# Altium PCB Filters.PcbDoc
Units mil, origin at the board's own origin, x right, y up, seen from the top; angles counter-clockwise.
Board outline 5500 x 6500 mil, 4 copper layers (Top Layer, Power, Ground, Bottom Layer), stack 68.756 mil thick; 70 components, 54 nets, 198 pads, 89 vias.
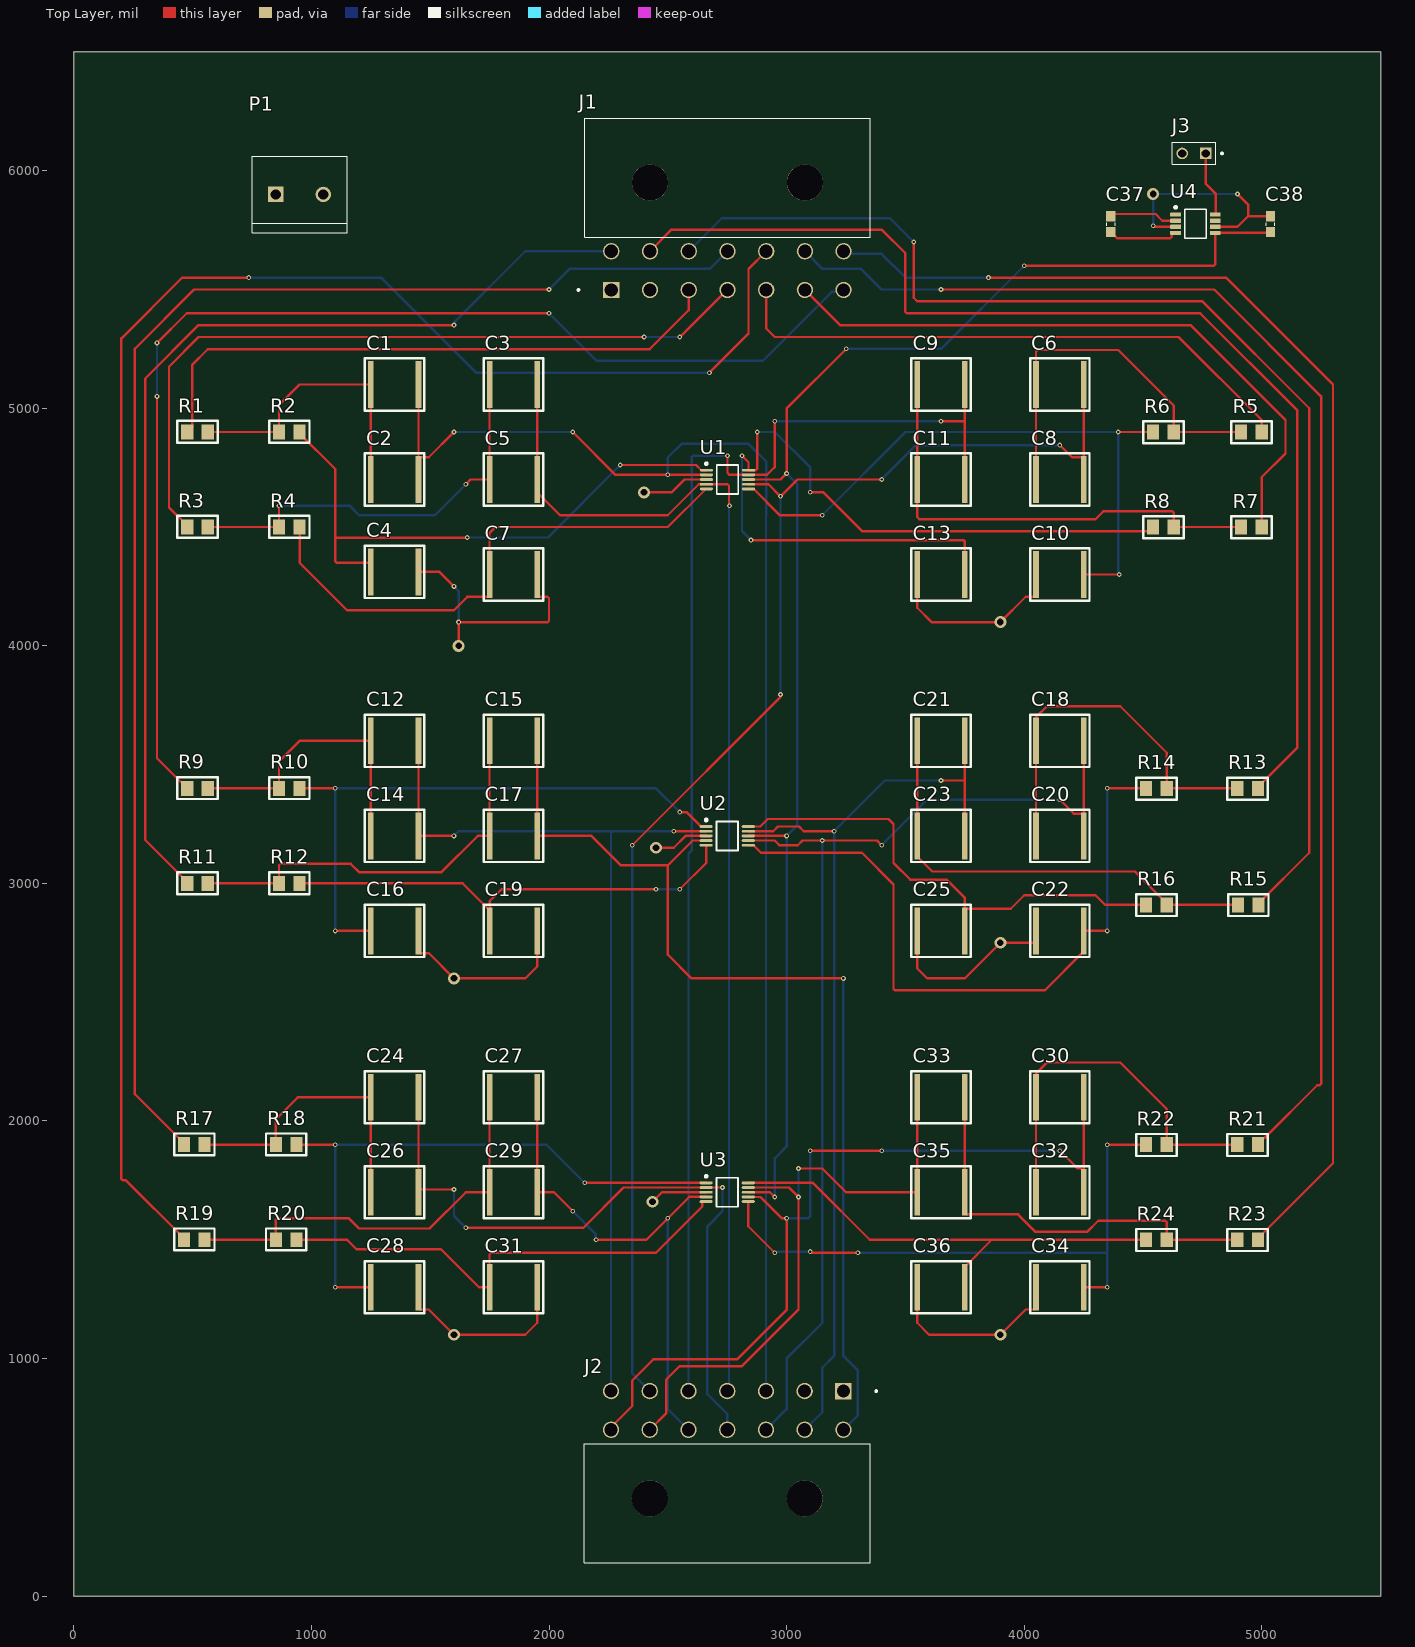
[diagram p0: Top Layer view]
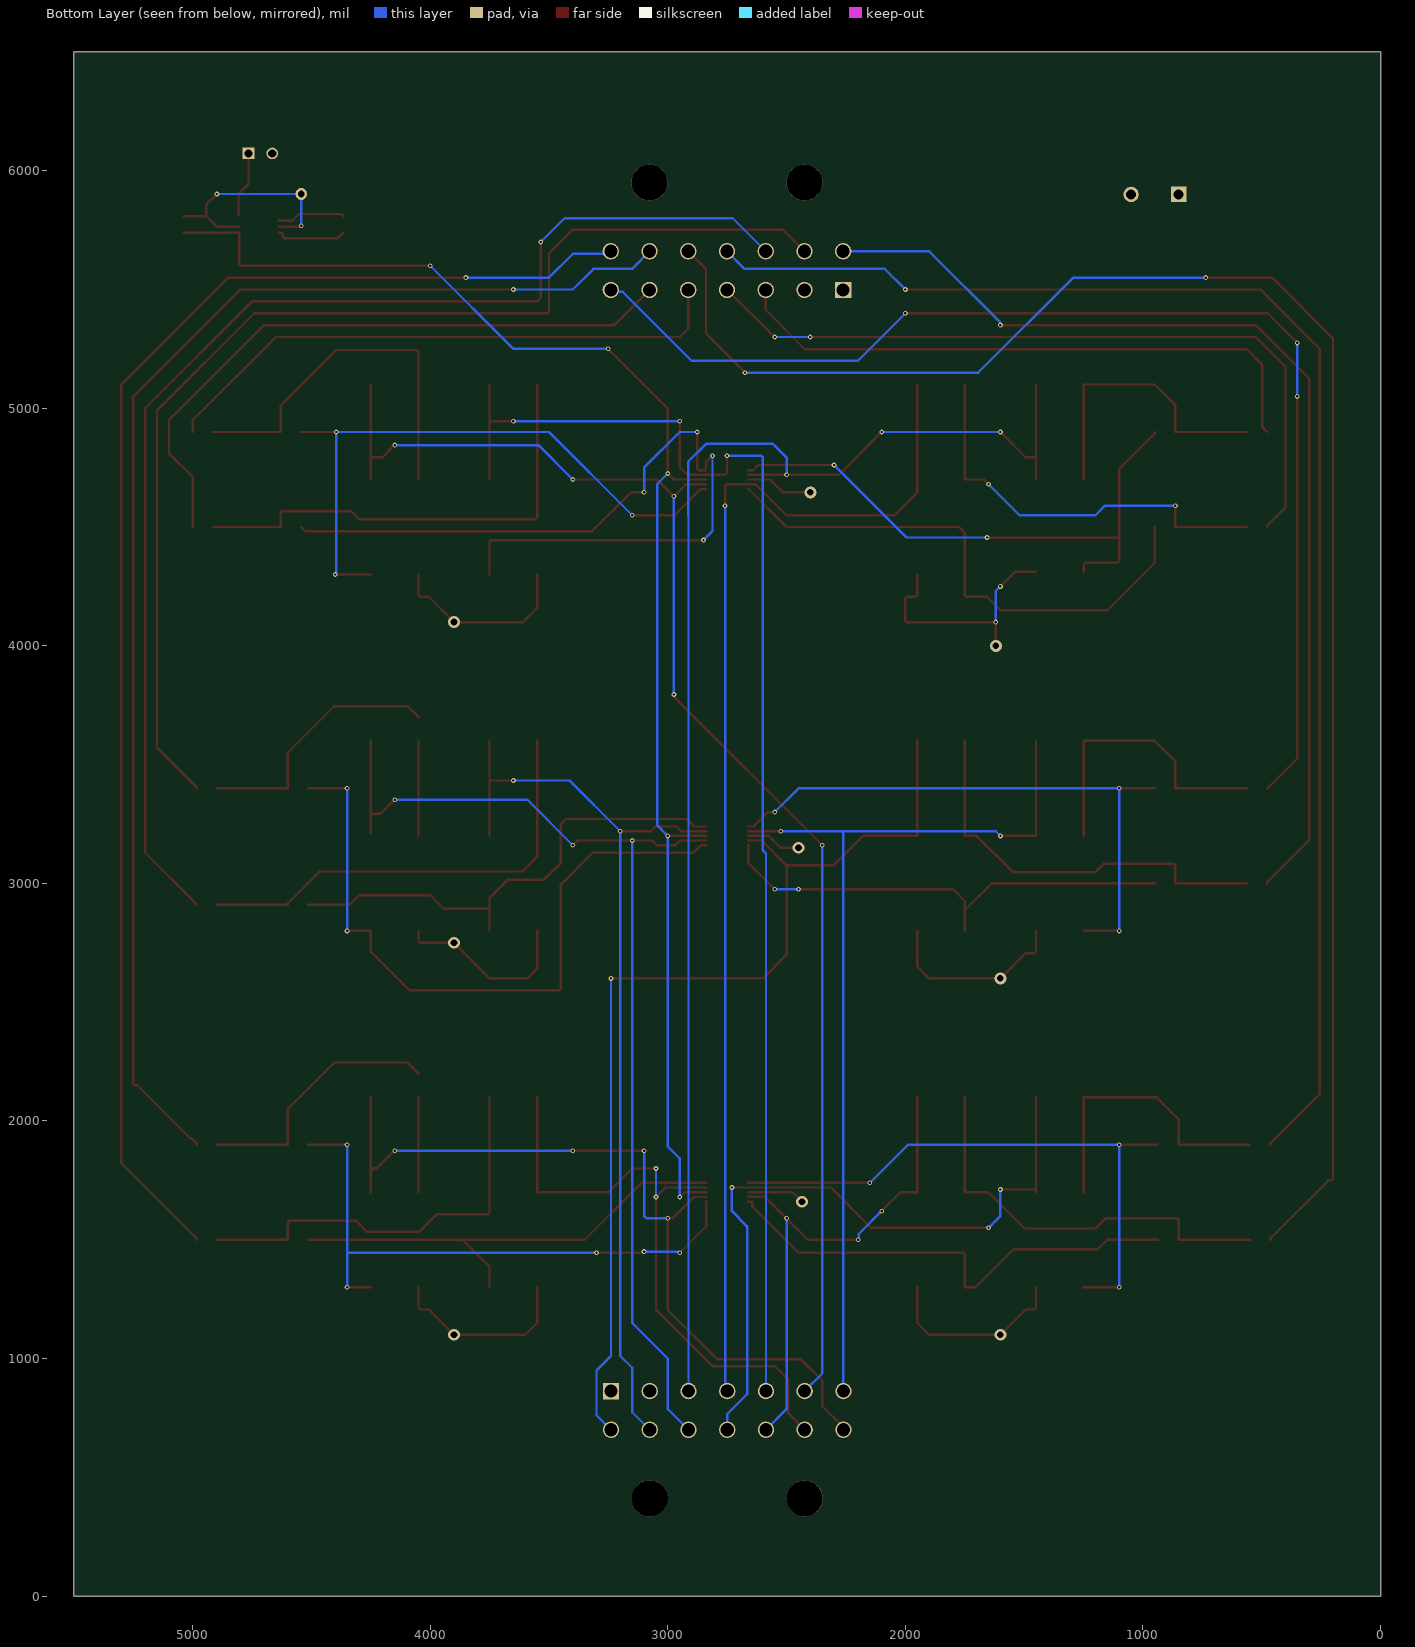
[diagram p1: Bottom Layer view, seen from below]
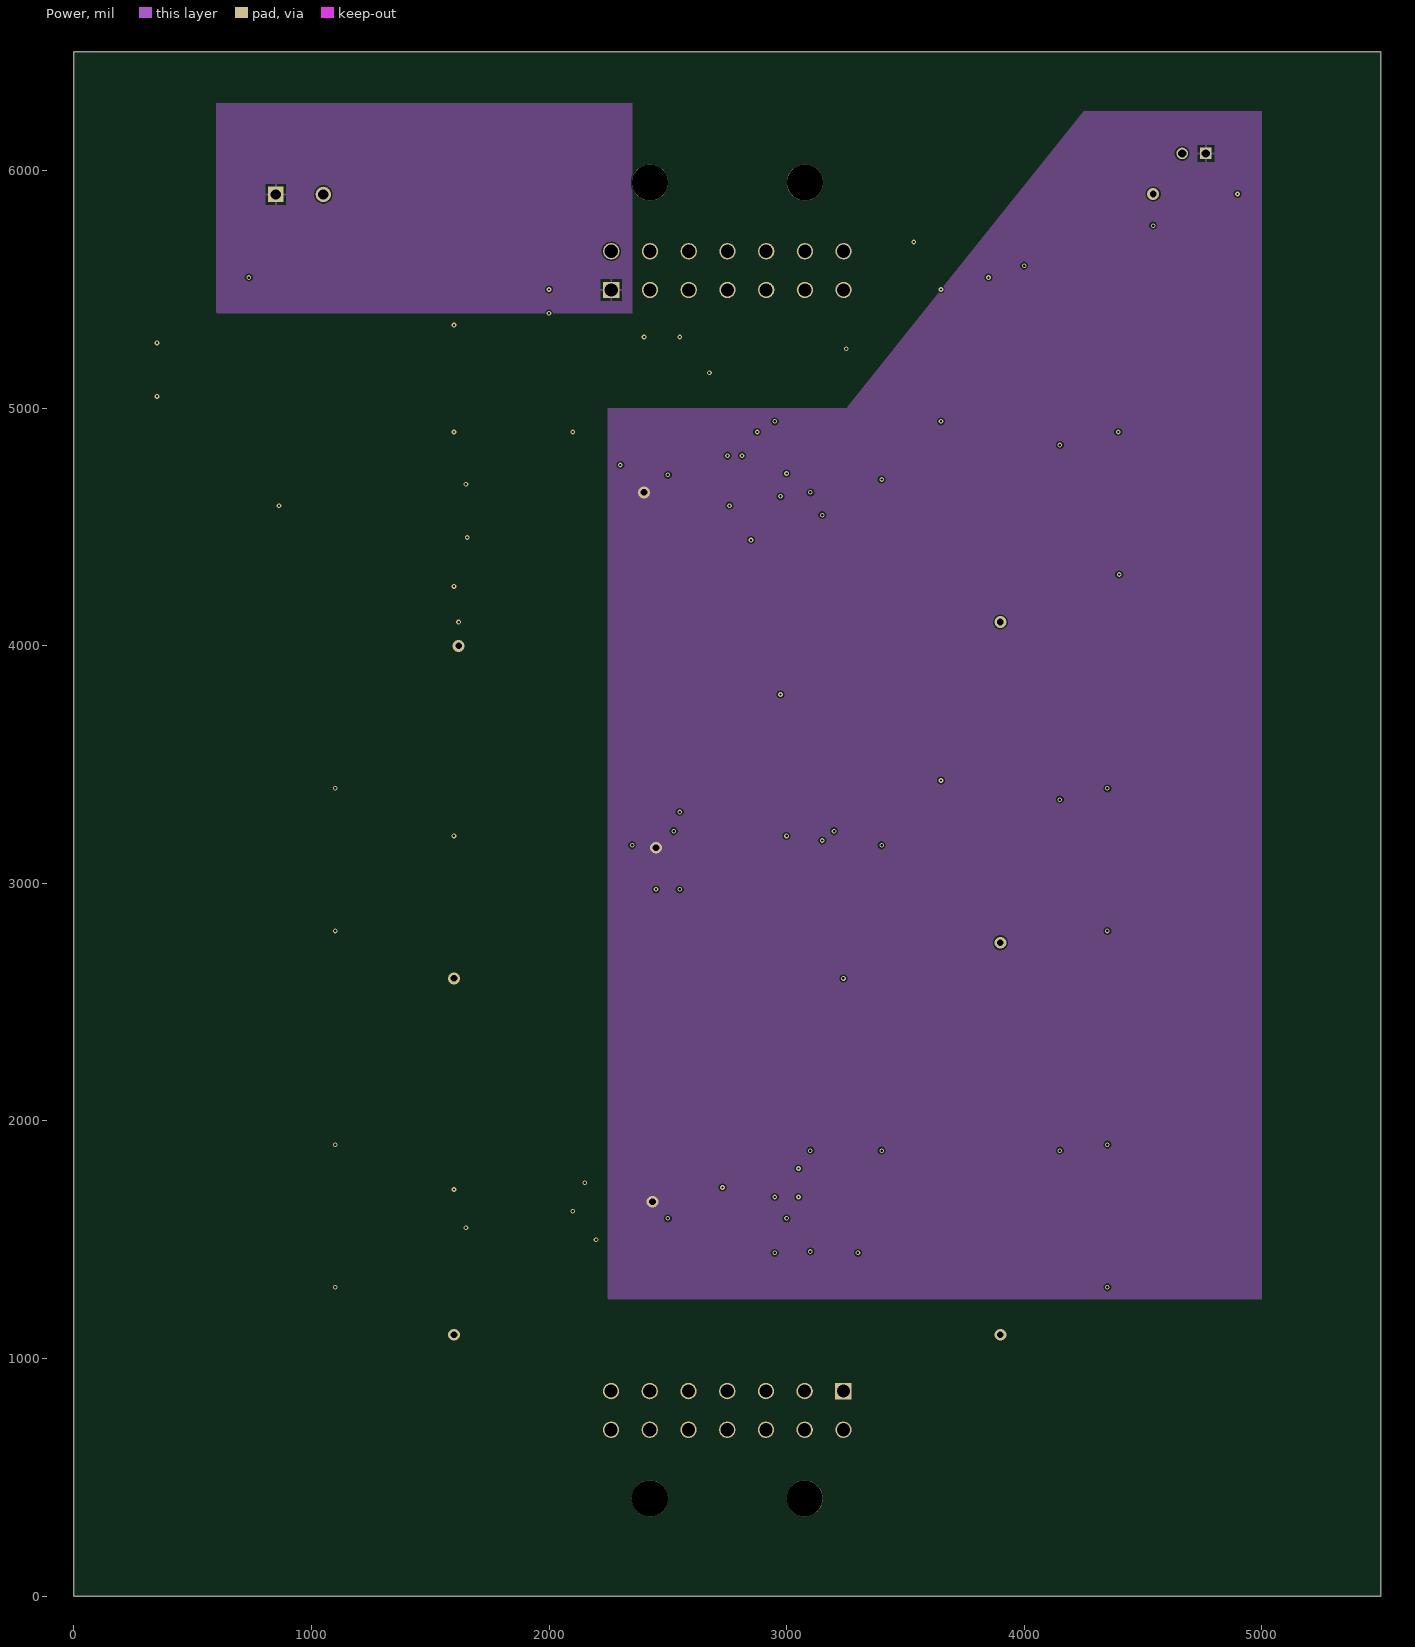
[diagram p2: Power]
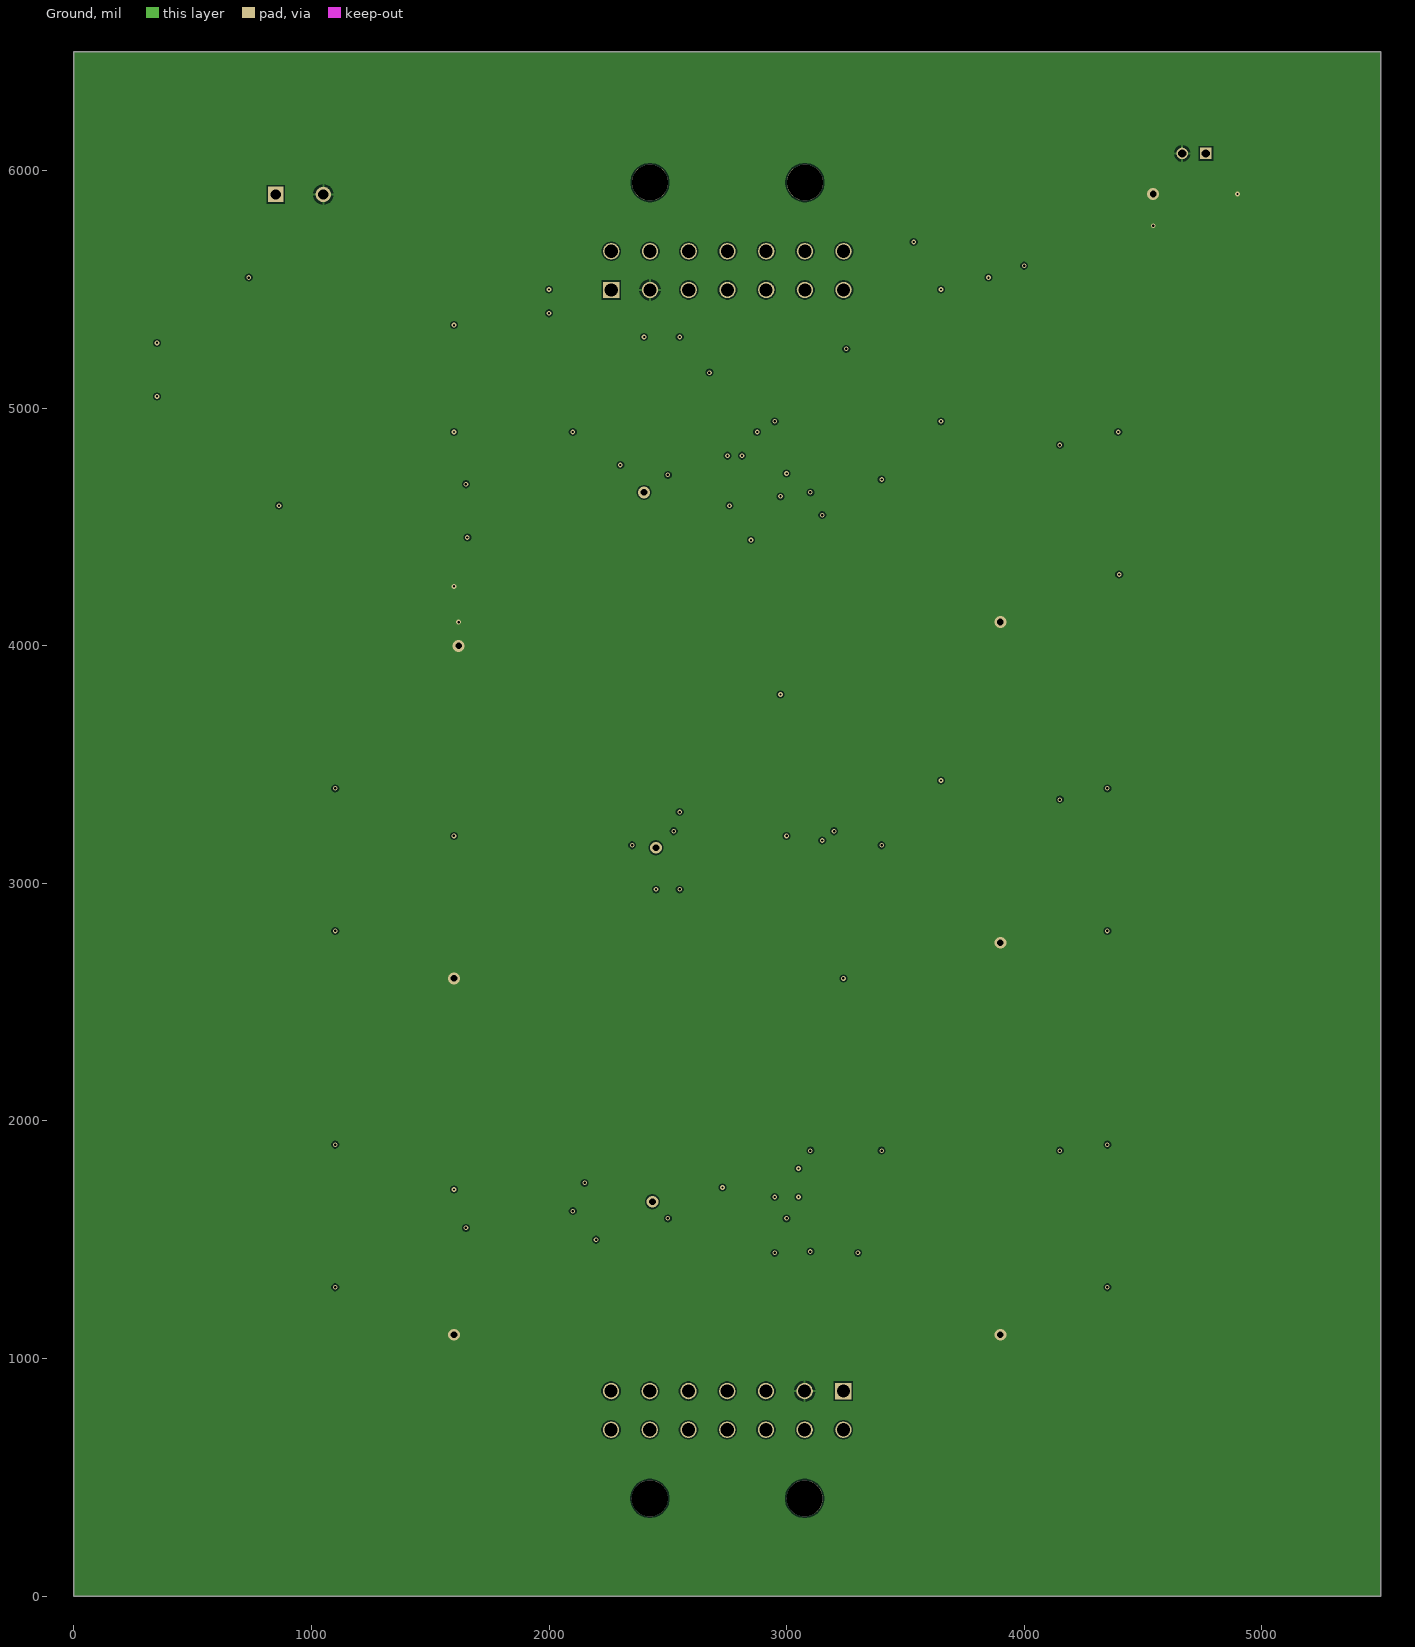
[diagram p3: Ground]

## Layer stack, top to bottom
Top Solder: solder mask 0.5, Solder Resist, Dk 3.3
Top Layer: signal copper 0.7
Dielectric 1: prepreg 2.8, PP-006, Dk 4.1
Power: signal copper 1.378
Dielectric1: core 59, FR-4, Dk 4.3
Ground: signal copper 1.378
Dielectric 2: prepreg 2.8, PP-006, Dk 4.1
Bottom Layer: signal copper 0.7
Bottom Solder: solder mask 0.5, Solder Resist, Dk 3.3

## Board outline
0,0 5500,0 5500,6500 0,6500

## Design rules (kind name [scope] priority, off if disabled: settings)
Clearance [All] p1: gap=6 ignorepadtopadclearanceinfootprint=TRUE
DiffPairsRouting [All] p1: maxlimit=10 minlimit=10 mostfreqgap=10 toplayer_minwidth=10 toplayer_maxwidth=10 toplayer_prefwidth=10 midlayer1_minwidth=10 midlayer1_maxwidth=10 midlayer1_prefwidth=10 midlayer2_minwidth=10 midlayer2_maxwidth=10 midlayer2_prefwidth=10 bottomlayer_minwidth=10 bottomlayer_maxwidth=10 bottomlayer_prefwidth=10 maxuncoupledlength=500
HoleSize [All] p1: absolutevalues=TRUE maxlimit=300 minlimit=10 maxpercent=80.000 minpercent=20.000
MinimumAnnularRing [All] p1: minimumring=10
PasteMaskExpansion [All] p1: expansion=10
PlaneClearance [All] p1: clearance=15
PlaneConnect [All] p1: pad.planeconnectstyle=Relief pad.reliefexpansion=20 pad.reliefentries=4 pad.reliefconductorwidth=10 pad.reliefairgap=10 via.planeconnectstyle=Direct via.reliefexpansion=20 via.reliefentries=4 via.reliefconductorwidth=10 via.reliefairgap=10
PolygonConnect [All] p1: thpad.connectstyle=Relief thpad.reliefconductorwidth=10 thpad.reliefentries=4 thpad.polygonreliefangle="90 Angle" thpad.airgapwidth=10 smdpad.connectstyle=Relief smdpad.reliefconductorwidth=10 smdpad.reliefentries=4 smdpad.polygonreliefangle="90 Angle" smdpad.airgapwidth=10 via.connectstyle=Direct via.reliefconductorwidth=10 via.reliefentries=4 via.polygonreliefangle="90 Angle" via.airgapwidth=10
RoutingVias [All] p1: holewidth=10 width=20 viastyle="Through Hole" minholewidth=10 minwidth=20 maxholewidth=10 maxwidth=20
SMDNeckDown [All] p1: percent=100.000
SilkToSolderMaskClearance SilkscreenOverComponentPads [IsPad] p1: minsilkscreentomaskgap=10 clearancetoexposedcopper=TRUE
SolderMaskExpansion [All] p1: expansion=10 istentingtop=FALSE
Width [All] p1: maxlimit=10 minlimit=10 preferedwidth=10
24 further rules are at their usual default settings.

## Components (designator, comment, footprint, x,y, rotation, side; value= is the part's Value field where it differs from the comment)
C1 "CAP CER 0.47UF 50V C0G/NP0 2220" "2220 (5650) Capacitor" 1350,5100 r180 top
C2 "CAP CER 0.47UF 50V C0G/NP0 2220" "2220 (5650) Capacitor" 1350,4700 r180 top
C3 "CAP CER 0.47UF 50V C0G/NP0 2220" "2220 (5650) Capacitor" 1850,5100 r180 top
C4 "CAP CER 0.47UF 50V C0G/NP0 2220" "2220 (5650) Capacitor" 1350,4311.22 r0 top
C5 "CAP CER 0.47UF 50V C0G/NP0 2220" "2220 (5650) Capacitor" 1850,4700 r180 top
C6 "CAP CER 0.47UF 50V C0G/NP0 2220" "2220 (5650) Capacitor" 4150,5100 r0 top
C7 "CAP CER 0.47UF 50V C0G/NP0 2220" "2220 (5650) Capacitor" 1850,4300 r0 top
C8 "CAP CER 0.47UF 50V C0G/NP0 2220" "2220 (5650) Capacitor" 4150,4700 r0 top
C9 "CAP CER 0.47UF 50V C0G/NP0 2220" "2220 (5650) Capacitor" 3650,5100 r0 top
C10 "CAP CER 0.47UF 50V C0G/NP0 2220" "2220 (5650) Capacitor" 4150,4300 r180 top
C11 "CAP CER 0.47UF 50V C0G/NP0 2220" "2220 (5650) Capacitor" 3650,4700 r0 top
C12 "CAP CER 0.47UF 50V C0G/NP0 2220" "2220 (5650) Capacitor" 1350,3600 r0 top
C13 "CAP CER 0.47UF 50V C0G/NP0 2220" "2220 (5650) Capacitor" 3650,4300 r180 top
C14 "CAP CER 0.47UF 50V C0G/NP0 2220" "2220 (5650) Capacitor" 1350,3200 r0 top
C15 "CAP CER 0.47UF 50V C0G/NP0 2220" "2220 (5650) Capacitor" 1850,3600 r0 top
C16 "CAP CER 0.47UF 50V C0G/NP0 2220" "2220 (5650) Capacitor" 1350,2800 r0 top
C17 "CAP CER 0.47UF 50V C0G/NP0 2220" "2220 (5650) Capacitor" 1850,3200 r0 top
C18 "CAP CER 0.47UF 50V C0G/NP0 2220" "2220 (5650) Capacitor" 4150,3600 r0 top
C19 "CAP CER 0.47UF 50V C0G/NP0 2220" "2220 (5650) Capacitor" 1850.39,2800 r0 top
C20 "CAP CER 0.47UF 50V C0G/NP0 2220" "2220 (5650) Capacitor" 4150,3200 r0 top
C21 "CAP CER 0.47UF 50V C0G/NP0 2220" "2220 (5650) Capacitor" 3650,3600 r0 top
C22 "CAP CER 0.47UF 50V C0G/NP0 2220" "2220 (5650) Capacitor" 4150,2800 r180 top
C23 "CAP CER 0.47UF 50V C0G/NP0 2220" "2220 (5650) Capacitor" 3650,3200 r0 top
C24 "CAP CER 0.47UF 50V C0G/NP0 2220" "2220 (5650) Capacitor" 1350,2100 r0 top
C25 "CAP CER 0.47UF 50V C0G/NP0 2220" "2220 (5650) Capacitor" 3650,2800 r180 top
C26 "CAP CER 0.47UF 50V C0G/NP0 2220" "2220 (5650) Capacitor" 1350,1700 r0 top
C27 "CAP CER 0.47UF 50V C0G/NP0 2220" "2220 (5650) Capacitor" 1850,2100 r0 top
C28 "CAP CER 0.47UF 50V C0G/NP0 2220" "2220 (5650) Capacitor" 1350,1300 r0 top
C29 "CAP CER 0.47UF 50V C0G/NP0 2220" "2220 (5650) Capacitor" 1850,1700 r0 top
C30 "CAP CER 0.47UF 50V C0G/NP0 2220" "2220 (5650) Capacitor" 4150,2100 r0 top
C31 "CAP CER 0.47UF 50V C0G/NP0 2220" "2220 (5650) Capacitor" 1850,1300 r0 top
C32 "CAP CER 0.47UF 50V C0G/NP0 2220" "2220 (5650) Capacitor" 4150,1700 r0 top
C33 "CAP CER 0.47UF 50V C0G/NP0 2220" "2220 (5650) Capacitor" 3650,2100 r0 top
C34 "CAP CER 0.47UF 50V C0G/NP0 2220" "2220 (5650) Capacitor" 4150,1300 r180 top
C35 "CAP CER 0.47UF 50V C0G/NP0 2220" "2220 (5650) Capacitor" 3650,1700 r0 top
C36 "CAP CER 0.47UF 50V C0G/NP0 2220" "2220 (5650) Capacitor" 3650,1300 r180 top
C37 "TACL106K010RTA" CAPC1608X90 4365,5775 r270 top
C38 "TACL106K010RTA" CAPC1608X90 5037,5775 r270 top
J1 "Connector Header, 14-Position, 2 Rows, Male Pin" TE_1-770973-0 2262.01,5498.03 r180 top
J2 "Connector Header, 14-Position, 2 Rows, Male Pin" TE_1-770973-0 3238.98,862.99 r0 top
J3 "146285-2" TE_146285-2 4764.98,6072.69 r180 top
P1 "282837-2" TE_282837-2 950,5900 r0 top
R1 "RES SMD 5.1K OHM 1% 0.4W 0805" "0805 Resistor" 520.08,4900 r0 top
R2 "RES SMD 5.1K OHM 1% 0.4W 0805" "0805 Resistor" 906.69,4900 r0 top
R3 "RES SMD 5.1K OHM 1% 0.4W 0805" "0805 Resistor" 520.08,4500 r0 top
R4 "RES SMD 5.1K OHM 1% 0.4W 0805" "0805 Resistor" 906.69,4500 r0 top
R5 "RES SMD 5.1K OHM 1% 0.4W 0805" "0805 Resistor" 4956.69,4900 r180 top
R6 "RES SMD 5.1K OHM 1% 0.4W 0805" "0805 Resistor" 4586.29,4900 r180 top
R7 "RES SMD 5.1K OHM 1% 0.4W 0805" "0805 Resistor" 4956.69,4500 r180 top
R8 "RES SMD 5.1K OHM 1% 0.4W 0805" "0805 Resistor" 4586.29,4500 r180 top
R9 "RES SMD 5.1K OHM 1% 0.4W 0805" "0805 Resistor" 520.08,3400 r0 top
R10 "RES SMD 5.1K OHM 1% 0.4W 0805" "0805 Resistor" 906.69,3400 r0 top
R11 "RES SMD 5.1K OHM 1% 0.4W 0805" "0805 Resistor" 520.08,3000 r0 top
R12 "RES SMD 5.1K OHM 1% 0.4W 0805" "0805 Resistor" 906.69,3000 r0 top
R13 "RES SMD 5.1K OHM 1% 0.4W 0805" "0805 Resistor" 4940.39,3400 r180 top
R14 "RES SMD 5.1K OHM 1% 0.4W 0805" "0805 Resistor" 4556.69,3400 r180 top
R15 "RES SMD 5.1K OHM 1% 0.4W 0805" "0805 Resistor" 4943.31,2910 r180 top
R16 "RES SMD 5.1K OHM 1% 0.4W 0805" "0805 Resistor" 4556.69,2910 r180 top
R17 "RES SMD 5.1K OHM 1% 0.4W 0805" "0805 Resistor" 506.69,1900 r0 top
R18 "RES SMD 5.1K OHM 1% 0.4W 0805" "0805 Resistor" 893.31,1900 r0 top
R19 "RES SMD 5.1K OHM 1% 0.4W 0805" "0805 Resistor" 506.69,1500 r0 top
R20 "RES SMD 5.1K OHM 1% 0.4W 0805" "0805 Resistor" 893.31,1500 r0 top
R21 "RES SMD 5.1K OHM 1% 0.4W 0805" "0805 Resistor" 4940.39,1900 r180 top
R22 "RES SMD 5.1K OHM 1% 0.4W 0805" "0805 Resistor" 4556.69,1900 r180 top
R23 "RES SMD 5.1K OHM 1% 0.4W 0805" "0805 Resistor" 4940.39,1500 r180 top
R24 "RES SMD 5.1K OHM 1% 0.4W 0805" "0805 Resistor" 4556.69,1500 r180 top
U1 "AD8244BRMZ" AD8244BRMZ 2750.98,4700 r0 top
U2 "AD8244BRMZ" AD8244BRMZ 2750,3200 r0 top
U3 "AD8244BRMZ" AD8244BRMZ 2750,1700 r0 top
U4 "tl7660CDGKR" DGK0008A_L 4721,5776.69 r0 top

## Footprints (in the part's own frame and the unit in brackets; to place one, negate y for a bottom-side part, rotate by r counter-clockwise, add the part's x,y. Pads: shape width x height; smd on the part's side, far side on the other; paste and mask are expansions set on the pad)
"0805 Resistor" [mm]
  rect 1.3x1.6 smd: 1(-1.1,0) 2(1.1,0)
  silkscreen extent -2.16,-1.14 2.16,1.2
"2220 (5650) Capacitor" [mm]
  rect 0.6x5 smd: 1(-2.55,0) 2(2.55,0)
  silkscreen extent -3.18,-2.79 3.18,2.79
AD8244BRMZ [mm] "Op Amp Quad Low Power Amplifier R-R O/P ±18V/36V 10-Pin MSOP Tube"
  oval 1.4x0.3 smd: 1(-2.25,1) 2(-2.25,0.5) 3(-2.25,0) 4(-2.25,-0.5) 5(-2.25,-1) 6(2.25,-1) 7(2.25,-0.5) 8(2.25,0) 9(2.25,0.5) 10(2.25,1)
  silkscreen extent -2.37,-1.55 1.15,1.82, body extent -1.55,-1.55 1.55,1.55, height 1.1
CAPC1608X90 [mm]
  rect 1.1x1 smd: +(-0.85,0) -(0.85,0)
  silkscreen extent -0.15,-0.45 0.15,0.45
DGK0008A_L [mm] "TSOP, 8-Leads, Body 3.1x3.1mm, Pitch 0.65mm, IPC High Density"
  rrect22% 1.15x0.45 smd: 1(-2.125,0.975) 2(-2.125,0.325) 3(-2.125,-0.325) 4(-2.125,-0.975) 5(2.125,-0.975) 6(2.125,-0.325) 7(2.125,0.325) 8(2.125,0.975)
  silkscreen extent -2.25,-1.55 1.15,1.87, body extent -2.45,-1.5 2.45,1.5, height 0.94
TE_1-770973-0 [mm]
  rect 1.75x1.75 hole 1.4: 1(0,0)
  round 1.75 hole 1.4: 2(-4.14,0) 3(-8.28,0) 4(-12.42,0) 5(-16.56,0) 6(-20.7,0) 7(-24.84,0) 8(0,-4.14) 9(-4.14,-4.14) 10(-8.28,-4.14) 11(-12.42,-4.14) 12(-16.56,-4.14) 13(-20.7,-4.14) 14(-24.84,-4.14)
  round 3.86 hole 3.86 unplated: ""(-20.7,-11.48) ""(-4.14,-11.48)
  silkscreen extent -27.7,-18.34 3.61,0.1
TE_146285-2 [mm]
  rect 1.24x1.24 hole 0.89: 1(0,0)
  round 1.24 hole 0.89: 2(2.54,0)
  silkscreen extent -1.82,-1.17 3.61,1.17
TE_282837-2 [mm]
  rect 1.65x1.65 hole 1.1: 1(-2.54,0)
  round 1.65 hole 1.1: 2(2.54,0)
  silkscreen extent -5.08,-4.1 5.08,4.1, body extent -5.68,0 5.08,8.2, height 7.25

## Part data
C1 C2 C3 C4 C5 C6 C7 C8 C9 C10 C11 C12 C13 C14 C15 C16 C17 C18 C19 C20 C21 C22 C23 C24 C25 C26 C27 C28 C29 C30 C31 C32 C33 C34 C35 C36: "Cap Ceramic 0.47uF 50V C0G 5% SMD 2220 125°C Embossed Plastic T/R", Capacitance=470nF, Case/Package=2220, Dielectric Material=Ceramic, Manufacturer=KEMET, Manufacturer Part Number=C2220C474J5GACAUTO, Supplier Part Number 1=399-C2220C474J5GACAUTOCT-ND, Tolerance=5%, Voltage Rating (DC)=50V, Category="Ceramic Capacitors", ComponentLink1Description=http://www.farnell.com/datasheets/2747618.pdf?src-supplier=Farnell, ComponentLink1URL=http://www.farnell.com/datasheets/2747618.pdf?src-supplier=Farnell, Lead Free="Lead Free", Pricing 1="1=4.64000, 10=3.74400, 50=3.21940, 100=2.92000, 500=2.17128 (USD)", Pricing 2="1=4.64000, 10=3.74400, 50=3.21940, 100=2.92000, 500=2.17128 (USD)", Pricing 3="1=4.64000, 10=3.75000, 50=3.22000, 100=2.91000, 1000=2.48000, 10000=2.48000 (USD)", RoHS=Yes, RoHS Compliant=Yes, Stock 1=950, Stock 2=950, Stock 3=1000, Supplier 1=Digi-Key, Supplier 2=Digi-Key, Supplier 3=Mouser, Supplier Part Number 2=399-C2220C474J5GACAUTODKR-ND, Supplier Part Number 3=80-C2220C474J5GAUTO
C37 C38: "Cap Tant Solid 10uF 10V L CASE 10% (1.6 X 0.85 X 0.85mm) SMD 1608-10 7.5 Ohm 125°C Plastic T/R", Capacitance=10uF, Case Code (Imperial)=0603, Case Code (Metric)=1608, Case/Package="Conformal Coated", Dielectric Material=Tantalum, ESR (Equivalent Series Resistance)=7.5R, Leakage Current=1uA, Manufacturer="Kyocera AVX", Max Operating Temperature=125°C, Min Operating Temperature=-55°C, Package=None, Package Quantity=3500, Supplier Part Number 1=478-TACL106K010RTACT-ND, Tolerance=10%, Voltage=10V, Availability=Unavailable, Category="Tantalum Capacitors", ComponentLink1Description=https://datasheet.ciiva.com/11219/tac-11219455.pdf?src-supplier=Avnet, ComponentLink1URL=https://datasheet.ciiva.com/11219/tac-11219455.pdf?src-supplier=Avnet, ComponentLink2Description=https://datasheet.ciiva.com/12907/tac-12907781.pdf?src-supplier=Mouser, ComponentLink2URL=https://datasheet.ciiva.com/12907/tac-12907781.pdf?src-supplier=Mouser, ComponentLink3Description=https://datasheet.ciiva.com/14598/70001310-14598278.pdf?src-supplier=Allied+Electronics, ComponentLink3URL=https://datasheet.ciiva.com/14598/70001310-14598278.pdf?src-supplier=Allied+Electronics, Construction=Flat, Depth=0.85mm, Dissipation Factor=20%, Height=0.85mm, Lead Pitch=0.55mm, Length=1.6mm, Manufacturer Part Number=TACL106K010RTA, MP=TACL106K010RTA, Number of Pins=2, Packaging="Tape and Reel", Polarity=Polar, Price=None, Pricing 1="1=2.54000, 10=2.05600, 50=1.79400, 100=1.56980, 500=1.19600, 1000=1.04650 (USD)", Pricing 2="1=2.54000, 10=2.05600, 50=1.79400, 100=1.56980, 500=1.19600, 1000=1.04650 (USD)", Pricing 3="3500=1.00913 (USD)", Radiation Hardening=No, RoHS=Yes, RoHS Compliant=Yes, Series=TAC, Stock 1=3500, Stock 2=3500, Stock 3=3500, Supplier 1=Digi-Key, Supplier 2=Digi-Key, Supplier 3=Digi-Key, Supplier Part Number 2=478-TACL106K010RTADKR-ND, Supplier Part Number 3=478-TACL106K010RTATR-ND, Termination=SMD/SMT, Voltage Rating=10V, Voltage Rating (DC)=10V, Width=0.85mm
J1 J2: library part 1-770973-0, "Connector Header, 14-Position, 2 Rows, Male Pin, PCB, White, Mate-N-Lok Series", Color=White, Contact Current Rating=9.5A, Flammability Rating="UL94 V-0", Insulation Resistance=100MR, Manufacturer="TE Connectivity", Max Operating Temperature=221°C, Max Voltage Rating (AC)=600V, Min Operating Temperature=-67°C, Number of Power Positions=14, Package=None, Package Quantity=200, Supplier Part Number 1=A32482-ND, Test Voltage=1.5kV, Approvals=CSA, Availability=Unavailable, Category="Power Connectors", Circuit Application=Power, ComponentLink1Description=https://datasheet.ciiva.com/19460/1963239-19460794.pdf?src-supplier=Jameco, ComponentLink1URL=https://datasheet.ciiva.com/19460/1963239-19460794.pdf?src-supplier=Jameco, ComponentLink2Description=https://datasheet.ciiva.com/1111/eng-cd-770973-g-1111842.pdf?src-supplier=Element14, ComponentLink2URL=https://datasheet.ciiva.com/1111/eng-cd-770973-g-1111842.pdf?src-supplier=Element14, ComponentLink3Description=https://datasheet.ciiva.com/710/eng-cd-770973-h-710742.pdf?src-supplier=Digi-Key, ComponentLink3URL=https://datasheet.ciiva.com/710/eng-cd-770973-h-710742.pdf?src-supplier=Digi-Key, ComponentLink4Description=https://datasheet.ciiva.com/16654/eng-cs-82181-softshell-high-density-0408-16654873.pdf?src-supplier=Avnet+Europe, ComponentLink4URL=https://datasheet.ciiva.com/16654/eng-cs-82181-softshell-high-density-0408-16654873.pdf?src-supplier=Avnet+Europe, Connector System=Wire-to-Board, Connector Type=Pin, Contact Gender=Male, Contact Material=Brass, Contact Plating=Tin, Contact Retention="No (Without)", Contact Type="Male Pin", Current Rating=9.5A, Fastening Type=Ramp, Height=11.86mm, Housing Color=White, Housing Material=Nylon, Length=30.56mm, Manufacturer Part Number=1-770973-0, Mating Alignment="Yes (With)", Mating Retention="Yes (With)", MF="{'manufacturer': 'TE Connectivity'}", Mount="Through Hole,Board", MP=1-770973-0, Number of Contacts=14, Number of Poles=14, Number of Ports=1, Number of Positions=14, Number of Rows=2, Number of Terminals/Pins=14, Orientation="Right Angle", Packaging=Bag, PCB Mount Alignment="No (Without)", PCB Mount Retention=With, PCB Thickness=1.57inch, Pitch=0.162inch, Plating Thickness=8.89um, Price=None, Pricing 1="1=6.69000, 10=6.05100, 100=5.29790, 500=4.46140, 1000=3.90372 (USD)", Pricing 2="1=6.19000, 10=5.42000, 25=5.24000, 50=5.07000, 100=4.89000, 250=4.38000 (USD)", Pricing 3="1=6.37000, 10=5.58000, 50=5.58000, 100=5.05000, 200=4.51000, 600=4.24000, 1000=3.71000, 2600=3.53000, 5000=3.45000, 10000=3.36000 (USD)", Radiation Hardening=No, REACH SVHC=Unknown, RoHS=Yes, RoHS Compliant=Yes, Row Spacing=0.163inch, Sealable="No (Without)", Series="Mini-Universal MATE-N-LOK", Stock 1=583, Stock 2=272, Stock 3=1677, Strain Relief="No (Without)", Supplier 1=Digi-Key, Supplier 2=Newark, Supplier 3=Mouser, Supplier Part Number 2=52K3387, Supplier Part Number 3=571-1-770973-0, Termination=Solder, VDE Tested=Yes, Voltage Rating=600V, Width=12.7mm
J3: Package=None, Supplier Part Number 1=A127998-ND, Availability=Unavailable, MP=146285-2, Price=None, Supplier 1=Digi-Key
P1: "Connector Terminal Blocks Receptacle 2 Position 5.08mm Solder Straight Thru-Hole 13.5A/Contact", Package=None, Supplier Part Number 1=A113320-ND, Availability=Good, Check_prices=https://www.snapeda.com/parts/282837-2/TE%20Connectivity%20AMP%20Connectors/view-part/2549980/?ref=eda, MF="TE Connectivity", MP=282837-2, Price=None, Purchase-URL=https://pricing.snapeda.com/search/part/282837-2/?ref=eda, SnapEDA_Link=https://www.snapeda.com/parts/282837-2/TE%20Connectivity%20AMP%20Connectors/view-part/2549980/?ref=snap, Supplier 1=Digi-Key
R1 R2 R3 R4 R5 R6 R7 R8 R9 R10 R11 R12 R13 R14 R15 R16 R17 R18 R19 R20 R21 R22 R23 R24: "Res Thick Film 0805 5.1kOhm 1% 2/5W ±100ppm/K Molded Paper T/R", Case/Package=0805, Manufacturer="Vishay Dale", Manufacturer Part Number=RCS08055K10FKEA, Max Operating Temperature=155°C, Max Power Dissipation=400mW, Min Operating Temperature=-55°C, Package Quantity=5000, Resistance=5.1kR, Resistor Type="Thick Film", Supplier Part Number 1=541-RCS08055K10FKEACT-ND, Temperature Coefficient=100ppm/°C, Tolerance=1%, Category="Chip SMD Resistors", ComponentLink1Description=http://www.vishay.com/docs/20065/rcse3.pdf?src-supplier=Digi-Key, ComponentLink1URL=http://www.vishay.com/docs/20065/rcse3.pdf?src-supplier=Digi-Key, Features="Automotive AEC-Q200", Height=0.02inch, Length=0.079inch, Number of Terminations=2, Packaging="Tape and Reel", Pricing 1="1=0.26000, 10=0.21800, 100=0.08510, 1000=0.03560, 2500=0.03264 (USD)", Pricing 2="1=0.26000, 10=0.21800, 100=0.08510, 1000=0.03560, 2500=0.03264 (USD)", Pricing 3="1=0.26000, 10=0.21800, 50=0.21800, 100=0.08600, 1000=0.03600, 10000=0.03400 (USD)", RoHS=Yes, Stock 1=3307, Stock 2=3307, Stock 3=1182, Supplier 1=Digi-Key, Supplier 2=Digi-Key, Supplier 3=Mouser, Supplier Part Number 2=541-RCS08055K10FKEADKR-ND, Supplier Part Number 3=71-RCS08055K10FKEA, Width=0.049inch
U1 U2 U3: "Op Amp Quad Low Power Amplifier R-R O/P ±18V/36V 10-Pin MSOP Tube", Case/Package=MSOP, Input Bias Current=0.5pA, Input Capacitance=3.3pF, Input Offset Voltage (Vos)=350uV, Manufacturer="Analog Devices", Max Dual Supply Voltage=18V, Max Frequency=1kHz, Max Operating Temperature=85°C, Max Supply Voltage=36V, Min Dual Supply Voltage=1.5V, Min Operating Temperature=-40°C, Min Supply Voltage=3V, Nominal Supply Current=2.5mA, Operating Supply Current=180uA, Output Current per Channel=8mA, Power Supply Rejection Ratio (PSRR)=90dB, Supplier Part Number 1=505-AD8244BRMZ-ND, Voltage Gain=0dB, -3db Bandwidth=3MHz, Bandwidth=3.6MHz, Category="Amplifiers - Op Amps, Buffer, Instrumentation", Common Mode Rejection Ratio=61.8dB, ComponentLink1Description=https://datasheet.ciiva.com/29970/ad8244-29970485.pdf?src-supplier=Avnet, ComponentLink1URL=https://datasheet.ciiva.com/29970/ad8244-29970485.pdf?src-supplier=Avnet, Gain Bandwidth Product=3MHz, Height=0.95mm, Lead Free="Contains Lead", Length=3.1mm, Manufacturer Part Number=AD8244BRMZ, Mount="Surface Mount", Number of Amplifiers=4, Number of Circuits=4, Number of Pins=10, Packaging=Rail/Tube, Pricing 1="1=7.39000, 10=6.67700, 25=6.36680, 100=5.52830, 250=5.27984, 500=4.83450 (USD)", Pricing 2="1=7.40000, 10=6.68000, 50=6.36000, 100=5.52000, 1000=4.39000, 10000=4.39000 (USD)", Pricing 3="10=5.95000, 20=5.56500 (GBP)", Quiescent Current=180uA, REACH SVHC="No SVHC", RoHS=Yes, Settling Time=18us, Slew Rate=0.8V/µs, Stock 1=3, Stock 2=351, Stock 3=500, Supplier 1=Digi-Key, Supplier 2=Mouser, Supplier 3=RSComponents, Supplier Part Number 2=584-AD8244BRMZ, Supplier Part Number 3=1831998P, Width=3.1mm
U4: library part TI-7660-8, "CMOS Voltage Converter 8-VSSOP -40 to 85", Case/Package=VSSOP, Manufacturer="Texas Instruments", Manufacturer Part Number=TL7660CDGKR, Max Input Voltage=10V, Max Operating Temperature=125°C, Min Operating Temperature=-40°C, Min Supply Voltage=1.5V, Nominal Supply Current=120uA, Output Current=20uA, Output Voltage=20V, Package Quantity=1, Quiescent Current=110uA, Supplier Part Number 1=296-TL7660CDGKRCT-ND, Switching Frequency=9kHz, Category="Voltage Regulators - Switching", ComponentLink1Description=https://datasheet.ciiva.com/15114/getdatasheetpartid-256695-15114098.pdf?src-supplier=Verical, ComponentLink1URL=https://datasheet.ciiva.com/15114/getdatasheetpartid-256695-15114098.pdf?src-supplier=Verical, ComponentLink2Description=https://datasheet.ciiva.com/2025/tl7660-2025569.pdf?src-supplier=Digi-Key, ComponentLink2URL=https://datasheet.ciiva.com/2025/tl7660-2025569.pdf?src-supplier=Digi-Key, ComponentLink3Description=https://datasheet.ciiva.com/2025/tl7660-2025570.pdf?src-supplier=Digi-Key, ComponentLink3URL=https://datasheet.ciiva.com/2025/tl7660-2025570.pdf?src-supplier=Digi-Key, ComponentLink4Description=https://datasheet.ciiva.com/2025/tl7660-2025571.pdf?src-supplier=Digi-Key, ComponentLink4URL=https://datasheet.ciiva.com/2025/tl7660-2025571.pdf?src-supplier=Digi-Key, Contact Plating=Gold, Lead Free="Lead Free", Logic Function=Inverting, Max Supply Voltage=10V, Number of Channels=1, Number of Outputs=1, Number of Pins=8, Output Type=Adjustable, Packaging="Tape and Reel", Pricing 1="1=1.79000, 10=1.61200, 25=1.52120, 100=1.29600, 250=1.21688, 500=1.06476, 1000=1.00450 (USD)", Pricing 2="1=1.79000, 10=1.61200, 25=1.52120, 100=1.29600, 250=1.21688, 500=1.06476, 1000=1.00450 (USD)", Pricing 3="2500=1.00450 (USD)", Pricing 4="1=1.72270, 10=1.54570, 25=1.47060, 100=1.22500, 250=1.13670, 500=0.99630, 1000=0.81540 (USD)", Pricing 5="1=1.79000, 10=1.62000, 25=1.53000, 50=1.53000, 100=1.30000, 250=1.22000, 500=1.07000, 1000=0.88300, 10000=0.88300 (USD)", Radiation Hardening=No, RoHS=Yes, RoHS Compliant=Yes, Series=-, Stock 1=3670, Stock 2=3670, Stock 3=2500, Stock 4=2412, Stock 5=1398, Supplier 1=Digi-Key, Supplier 2=Digi-Key, Supplier 3=Digi-Key, Supplier 4="Arrow Electronics", Supplier 5=Mouser, Supplier Part Number 2=296-TL7660CDGKRDKR-ND, Supplier Part Number 3=296-TL7660CDGKRTR-ND, Supplier Part Number 4=TL7660CDGKR, Supplier Part Number 5=595-TL7660CDGKR, Supply Current=120uA, Synchronous Rectifier=No, Weight=0.000935oz, Width=3mm

## Via types
v1: diameter 20, hole 10, Top Layer to Bottom Layer, 79 vias
v2: diameter 50, hole 28, Top Layer to Bottom Layer, 10 vias

## Nets (pads, with @x,y where several pads share a name; then routed paths per layer and width w, separated by ;. In a path a pad name is that pad's centre, name@x,y a point inside that pad or via, vN(x,y) a via of type N, cw(c..) or ccw(c..) an arc to the next point about the centre after c; other vN are vias at no path point)
+5V: J3.1 U1.3 U2.3 U3.3 U4.8 | length 1035.8
  Top Layer w10: v2(2400,4645.98) 2515.48,4645.98 2569.5,4700 U1.3 ; v2(2435.29,1659.79) 2475.49,1700 U3.3 ; v2(2450,3150) 2524.88,3150 2574.88,3200 U2.3 ; J3.1 4764.98,5944.12 4807.11,5901.99 4807.11,5817.52 U4.8
+24V: J1.1 P1.1
-5V: C38.- U1.8 U2.8 U3.8 U4.5 | length 6251.6
  Top Layer w10: U3.8 2929.97,1700 v1(2950,1679.97) ; U2.8 v1(3000,3200) ; U1.8 2974.41,4700 v1(3000,4725.59) 3000,4999.02 v1(3250.98,5250) ; v1(4000,5600) 4798.8,5600 4804.66,5605.86 U4.5 5033.76,5738.3 C38.-
  Bottom Layer w10: v1(2950,1679.97) 2950,1842.29 3000,1892.29 v1(3000,3200) 3045.28,3245.28 3045.28,4680.32 v1(3000,4725.59) ; v1(3250.98,5250) 3650,5250 v1(4000,5600)
GND: C4.2 C7.2 C10.2 C13.2 C16.2 C19.2 C22.2 C25.2 C28.2 C31.2 C34.2 C36.2 C38.+ J1.2 J2.2 J3.2 P1.2 U4.3 U4.6 | length 6005.8
  Top Layer w10: C28.2 1450.39,1213.39 1457.2,1206.57 1493.43,1206.57 v2(1600,1100) 1900,1100 1950.39,1150.39 C31.2 ; C16.2 1450.39,2713.39 1457.2,2706.57 1493.43,2706.57 v2(1600,2600) 1900,2600 1950,2650 1950,2799.21 C19.2 ; C4.2 1538.78,4311.22 v1(1600,4250) ; v2(1619.29,4000) v1(1619.29,4100) 1994.14,4100 2000,4105.86 2000,4200 1993.43,4206.57 1957.2,4206.57 1950.39,4213.39 C7.2 ; J1.2@2425,5485.82 J1.2 ; C36.2 3549.61,1150.39 3600,1100 v2(3900,1100) 4006.57,1206.57 4042.8,1206.57 4049.61,1213.39 C34.2 ; C25.2 3549.61,2642.36 3591.97,2600 3750,2600 v2(3900,2750) 4042.8,2750 4049.61,2756.81 C22.2 ; C13.2 3549.61,4160.37 3609.97,4100 v2(3900,4100) 4006.57,4206.57 4042.8,4206.57 4049.61,4213.39 C10.2 ; v1(4542.98,5768.48) 4545.69,5768.48 4550.28,5763.89 U4.3 ; U4.6 4898.09,5763.89 4942.67,5808.46 ; v1(4898.09,5901.99) 4942.67,5857.41 4942.67,5808.46 ; C38.+ 4942.67,5808.46
  Bottom Layer w10: v1(1600,4250) 1600,4249.4 1619.29,4230.11 v1(1619.29,4100) ; v1(4542.98,5768.48) v2(4542.98,5901.99) v1(4898.09,5901.99)
NetC1_1: C1.1 C2.1 J2.3 U1.2 | length 6188.2
  Top Layer w10: C2.1 C2.1@1450.39,4786.61 ; C1.1 C2.1@1450.39,4786.61 ; v1(1600,4900) 1493.43,4793.43 1457.2,4793.43 C2.1@1450.39,4786.61 ; v1(2100,4900) 2280.31,4719.69 U1.2
  Bottom Layer w10: v1(1600,4900) v1(2100,4900) ; v1(2500,4719.69) 2500,4792.67 2557.33,4850 2839.57,4850 2913.98,4775.59 2913.98,4550 2912.99,4549.02 J2.3
NetC1_2: C1.2 C2.2 R1.2 R2.1 | length 1235.5
  Top Layer w10: R1.2 R2.1 863.39,5013.39 950,5100 C1.2 C2.2
NetC3_1: C3.1 C5.1 J2.4 U1.4 | length 5173.3
  Top Layer w10: C3.1 C5.1 1950.39,4645.79 2046.18,4550 2500,4550 2630.32,4680.32 U1.4 2662.75,4679.97 2751.33,4679.97 2757.68,4673.62 2757.68,4591.91 v1(2759.6,4590)
  Bottom Layer w10: J2.4 2757.68,870.67 2757.68,4588.09 v1(2759.6,4590)
NetC3_2: C3.2 C5.2 R3.2 R4.1 | length 1754.9
  Top Layer w10: R3.2 R4.1 v1(863.39,4590) ; v1(1650,4680.32) 1669.68,4700 C5.2 C3.2
  Bottom Layer w10: v1(863.39,4590) 1160,4590 1200,4550 1519.68,4550 v1(1650,4680.32)
NetC4_1: C4.1 R2.2 U1.1 | length 2491.2
  Top Layer w10: R2.2 950,4894.09 1100,4744.09 1100,4455 ; C4.1 1249.61,4343.19 1242.8,4350 1105.86,4350 1100,4355.86 1100,4455 ; v1(1656.18,4456) 1655.18,4455 1100,4455 ; v1(2300,4761.02) 2619.09,4761.02 2640.75,4739.37 U1.1
  Bottom Layer w10: v1(1656.18,4456) 1994.98,4456 v1(2300,4761.02)
NetC6_1: C6.1 C8.1 R5.2 R6.1 | length 1613.4
  Top Layer w10: C8.1 4049.61,5239.14 4055.46,5245 4395.83,5245 4629.6,5011.23 R6.1 R5.2
NetC6_2: C6.2 C8.2 J2.6 U1.7 | length 6087.7
  Top Layer w10: v1(2350,3160.63) 2972.5,3783.13 2972.5,3793.36 v1(2974.41,3795.28) ; U1.7 2923.23,4680.32 v1(2974.41,4629.13) 3045.28,4700 v1(3400,4700) ; v1(4150,4845) 4201.57,4793.43 4243.58,4793.43 4250.39,4786.61 C8.2 C6.2
  Bottom Layer w10: v1(2350,3160.63) 2350,937.01 J2.6 ; v1(2974.41,3795.28) v1(2974.41,4629.13) ; v1(3400,4700) 3545,4845 v1(4150,4845)
NetC7_1: C7.1 R4.2 U1.5 | length 2309.5
  Top Layer w10: R4.2 950,4350 1150,4150 1599.61,4150 1656.18,4206.57 1742.8,4206.57 1749.61,4213.39 C7.1 1749.61,4474.99 1774.62,4500 2500,4500 U1.5@2661.52,4661.52
NetC9_1: C9.1 C11.1 R7.2 R8.1 | length 2001.3
  Top Layer w10: C9.1 C11.1 3549.61,4542.39 3559,4533 4300,4533 4332.86,4565.86 4623.74,4565.86 4629.6,4560 R8.1 R7.2
NetC9_2: C9.2 C11.2 J2.5 U1.9 | length 5770.8
  Top Layer w10: v1(2750.98,4800) 2750.98,4728.3 2759.6,4719.69 U1.9 2839.91,4720.03 2917.67,4720.03 2950,4752.36 v1(2950,4945) ; v1(3650,4945) 3750.39,4945 ; C11.2 3750.39,4945 ; C9.2 3750.39,4945
  Bottom Layer w10: J2.5 2587.01,3125.98 2600,3138.98 2600,4794.14 2605.86,4800 v1(2750.98,4800) ; v1(2950,4945) v1(3650,4945)
NetC10_1: C10.1 R6.2 U1.6 | length 2646.4
  Top Layer w10: U1.6 2840.16,4660.04 2861.81,4660.04 2972.83,4549.02 3149.02,4549.02 v1(3150,4550) ; C10.1 v1(4400,4300) ; v1(4395.83,4900) R6.2
  Bottom Layer w10: v1(3150,4550) 3500,4900 v1(4395.83,4900) 4395.83,4306.88 4400,4302.71 v1(4400,4300)
NetC12_1: C12.1 C14.1 R9.2 R10.1 | length 1235.5
  Top Layer w10: R9.2 R10.1 863.39,3513.39 950,3600 C12.1 C14.1
NetC12_2: C12.2 C14.2 J2.7 U2.2 | length 3979.5
  Top Layer w10: C12.2 C14.2 v1(1599.61,3200) ; v1(2524.88,3219.69) U2.2
  Bottom Layer w10: v1(1599.61,3200) 1619.29,3219.69 2269.69,3219.69 ; J2.7 2261.02,3211.02 2269.69,3219.69 ; v1(2524.88,3219.69) 2269.69,3219.69
NetC13_1: C13.1 R8.2 U1.10 | length 3585.7
  Top Layer w10: v1(2812.01,4800) 2839.57,4772.44 U1.10 2839.91,4739.72 2869.81,4739.72 2875.98,4745.89 v1(2875.98,4900) ; v1(2850,4445) 3744.54,4445 3750.39,4439.14 C13.1 ; v1(3100,4645.98) 3155.01,4645.98 3317.99,4482.99 4525.97,4482.99 R8.2
  Bottom Layer w10: v1(2812.01,4800) 2812.01,4482.99 v1(2850,4445) ; v1(2875.98,4900) 2950,4900 3100,4750 v1(3100,4645.98)
NetC15_1: C15.1 C17.1 R11.2 R12.1 | length 1742.3
  Top Layer w10: R11.2 R12.1 863.39,3076.14 869.24,3082 1165.4,3082 1200,3047.4 1547.4,3047.4 1700,3200 C17.1 C15.1
NetC15_2: C15.2 C17.2 J2.8 U2.4 | length 4312.5
  Top Layer w10: C15.2 C17.2 2178.6,3200 2303.01,3075.59 2500,3075.59 ; U2.4 2604.72,3180.31 2500,3075.59 ; v1(3238.98,2600) 2600,2600 2500,2700 2500,3075.59
  Bottom Layer w10: J2.8 3300,761.02 3300,950 3238.98,1011.02 v1(3238.98,2600)
NetC16_1: C16.1 R10.2 U2.1 | length 2527.6
  Top Layer w10: R10.2 v1(1100,3400) ; v1(1100,2800) C16.1 ; v1(2550,3300) 2579.13,3300 2639.76,3239.37 U2.1
  Bottom Layer w10: v1(1100,2800) v1(1100,3400) 2450,3400 v1(2550,3300)
NetC18_1: C18.1 C20.1 R13.2 R14.1 | length 1497.6
  Top Layer w10: C20.1 C18.1 ; 4049.61,3700 4095.46,3745.86 4404.14,3745.86 4600,3550 R14.1 R13.2
NetC18_2: C18.2 C20.2 J2.10 U2.7 | length 4585.8
  Top Layer w10: U2.7 2949.78,3180.31 2969.47,3160.63 3046.63,3160.63 3066.32,3180.31 v1(3150,3180.31) 3380.31,3180.31 v1(3400,3160.63) ; v1(4150,3352.6) 4209.17,3293.43 4243.58,3293.43 4250.39,3286.61 4250.39,3211.22 C18.2
  Bottom Layer w10: J2.10 3000,787.01 3000,1000 3150,1150 v1(3150,3180.31) ; v1(3400,3160.63) 3591.97,3352.6 v1(4150,3352.6)
NetC19_1: C19.1 R12.2 U2.5 | length 2024.5
  Top Layer w10: R12.2 1636.61,3000 C19.1@1750,2886.61 ; C19.1 C19.1@1750,2886.61 ; v1(2450,2974.99) 1800,2974.99 1750,2924.99 C19.1@1750,2886.61 ; v1(2550,2974.99) 2661.42,3086.41 U2.5
  Bottom Layer w10: v1(2450,2974.99) v1(2550,2974.99)
NetC21_1: C21.1 C23.1 R15.2 R16.1 | length 1924.7
  Top Layer w10: C21.1 C23.1 3549.61,3113.39 3612.99,3050 4465.91,3050 4600,2915.91 R16.1 R15.2
NetC21_2: C21.2 C23.2 J2.9 U2.9 | length 4082.7
  Top Layer w10: U2.9 2944.09,3219.69 2963.78,3239.37 3052.54,3239.37 3072.22,3219.69 v1(3200,3219.69) ; v1(3650,3433) 3750.39,3433 ; C23.2 C23.2@3750.39,3286.61 ; C23.2@3750.39,3204.41 C23.2@3750.39,3286.61 ; C21.2 3750.39,3433 ; C23.2@3750.39,3286.61 3750.39,3433
  Bottom Layer w10: J2.9@3075.98,712.99 J2.9 3150,774.02 3150,961.02 3200,1011.02 3200,3075.59 v1(3200,3219.69) 3413.31,3433 v1(3650,3433)
NetC22_1: C22.1 R14.2 U2.6 | length 2939.8
  Top Layer w10: U2.6 2860.49,3160.63 2891.99,3129.13 3316.84,3129.13 3450,2995.98 3450,2555.86 3455.86,2550 4087.01,2550 4250.39,2713.39 C22.1 v1(4350,2800) ; v1(4350,3400) R14.2
  Bottom Layer w10: v1(4350,2800) v1(4350,3400)
NetC24_1: C24.1 C26.1 R17.2 R18.1 | length 1245.1
  Top Layer w10: R17.2 R18.1 850,2007 943,2100 C24.1 C26.1
NetC24_2: C24.2 C26.2 J2.11 U3.2 | length 2965.8
  Top Layer w10: C26.2 C26.2@1450.39,1704.41 ; C24.2 C26.2@1450.39,1704.41 ; v1(1600,1711.22) 1457.2,1711.22 C26.2@1450.39,1704.41 ; v1(1650,1550) 2143.66,1550 2313.35,1719.69 U3.2 v1(2730.31,1719.69)
  Bottom Layer w10: v1(1600,1711.22) 1600,1600 v1(1650,1550) ; v1(2730.31,1719.69) 2730.31,1620.31 2666.34,1556.34 2666.34,849.8 2750,766.14 J2.11
NetC25_1: C25.1 R16.2 U2.10 | length 2102.5
  Top Layer w10: U2.10 2889.37,3239.37 2920.87,3270.87 3429.13,3270.87 3450,3250 3450,3086.41 3520.7,3015.7 3672.88,3015.7 3750.39,2938.19 C25.1@3750.39,2886.61 ; C25.1 C25.1@3750.39,2886.61 ; R16.2 4340,2910 4300,2950 4000,2950 3943.43,2893.43 3757.2,2893.43 C25.1@3750.39,2886.61
NetC27_1: C27.1 C29.1 R19.2 R20.1 | length 1767
  Top Layer w10: R19.2 R20.1 850,1584.14 855.86,1590 1157.4,1590 1200,1547.4 1497.4,1547.4 1650,1700 C29.1 C27.1
NetC27_2: C27.2 C29.2 J2.12 U3.4 | length 2220.9
  Top Layer w10: C27.2 C29.2 2020.32,1700 v1(2100,1620.31) ; v1(2197.98,1500) 2410,1500 v1(2500,1590) 2590.31,1680.31 U3.4 U3.4@2661.24,1680.14 ; J2.12 J2.12@2587.01,712.99
  Bottom Layer w10: v1(2100,1620.31) 2196.07,1524.24 2196.07,1501.91 v1(2197.98,1500) ; v1(2500,1590) 2500,787.01 J2.12
NetC28_1: C28.1 R18.2 U3.1 | length 2540.9
  Top Layer w10: R18.2 v1(1100,1900) ; v1(1100,1300) C28.1 ; v1(2150,1739.37) U3.1
  Bottom Layer w10: v1(1100,1300) v1(1100,1900) 1989.37,1900 v1(2150,1739.37)
NetC30_1: C30.1 C32.1 R21.2 R22.1 | length 1497.2
  Top Layer w10: C32.1 C30.1 ; 4050,2200 4095.86,2245.86 4404.14,2245.86 4600,2050 R22.1 R21.2
NetC30_2: C30.2 C32.2 J2.14 U3.7 | length 3567.6
  Top Layer w10: J2.14 2261.02,711.02 2350,800 2350,907.28 2438.98,996.26 2791.54,996.26 3000,1204.72 v1(3000,1590) 2980.32,1590 2890.35,1679.97 2838.93,1679.97 U3.7 ; v1(3100,1874.99) v1(3400,1874.99) ; v1(4150,1874.99) 4223.68,1801.31 4235.7,1801.31 C32.2@4250.39,1786.61 ; C32.2 C32.2@4250.39,1786.61 ; C30.2 C32.2@4250.39,1786.61
  Bottom Layer w10: v1(3000,1590) 3090,1590 3100,1600 v1(3100,1874.99) ; v1(3400,1874.99) v1(4150,1874.99)
NetC31_1: C31.1 R20.2 U3.5 | length 2050.3
  Top Layer w10: R20.2 1150,1500 1190,1460 1545,1460 1705,1300 C31.1 1749.61,1439.14 1755.46,1445 2450,1445 2644.72,1639.72 2644.72,1659.79 2645.56,1660.63 U3.5
NetC33_1: C33.1 C35.1 J2.13 U3.9 | length 2697.7
  Top Layer w10: J2.13 2492.64,768.63 2492.64,910.63 2550,967.99 2812.13,967.99 3050,1205.86 v1(3050,1679.97) 3010.28,1719.69 U3.9 ; v1(3050,1800) 3149.98,1800 3249.98,1700 C35.1 C33.1
  Bottom Layer w10: J2.13 J2.13@2435.29,711.27 ; v1(3050,1679.97) v1(3050,1800)
NetC33_2: C33.2 C35.2 R23.2 R24.1 | length 1762.6
  Top Layer w10: C33.2 C35.2 3750.39,1613.39 3757.2,1606.57 3974.31,1606.57 4047.89,1533 4265,1533 4312,1580 4594.14,1580 4600,1574.14 R24.1 R23.2
NetC34_1: C34.1 R22.2 U3.6 | length 2528.9
  Top Layer w10: U3.6 2838.58,1556.42 v1(2950,1445) ; v1(3100,1450) 3102.71,1450 3107.71,1445 v1(3300,1445) ; C34.1 v1(4350,1300) ; v1(4350,1900) R22.2
  Bottom Layer w10: v1(2950,1445) 2952.71,1445 2957.71,1450 v1(3100,1450) ; v1(3300,1445) 3350,1445 4350,1445 ; v1(4350,1300) 4350,1445 ; v1(4350,1900) 4350,1445
NetC36_1: C36.1 R24.2 U3.10 | length 2020.9
  Top Layer w10: U3.10 3110.63,1739.37 3350,1500 3863.78,1500 ; C36.1 3750.39,1386.61 3863.78,1500 ; R24.2 3863.78,1500
NetC37_+: C37.+ U4.2 | length 293.2
  Top Layer w10: C37.+ 4374.05,5817.52 4553.53,5817.52 4581.57,5789.48 U4.2 U4.2@4633.48,5793.34
NetC37_-: C37.- U4.4 | length 300.6
  Top Layer w10: C37.- 4365,5739.57 4379.69,5724.88 4381.65,5724.88 4390.87,5715.66 4614.7,5715.66 4621.55,5722.52 4621.55,5734.44 4625.41,5738.3 U4.4
NetJ1_3: J1.3 R1.1 | length 2562.1
  Top Layer w10: R1.1 497.36,4920.59 497.36,5182.28 563.39,5248.31 2423.32,5248.31 2587.99,5412.98 J1.3
NetJ1_4: J1.4 R3.1 | length 3191.5
  Top Layer w10: R3.1 476.77,4505.91 400,4582.68 400,5174.92 525.08,5300 v1(2400,5300) ; v1(2550,5300) 2551.48,5300 2749.51,5498.03 J1.4
  Bottom Layer w10: v1(2400,5300) v1(2550,5300)
NetJ1_5: J1.5 R5.1 | length 2457.9
  Top Layer w10: J1.5 2913.98,5336.02 2950,5300 4650,5300 5000,4950 R5.1
NetJ1_6: J1.6 R7.1 | length 2741.5
  Top Layer w10: J1.6 3225,5350 4700,5350 5100,4950 5100,4810 5000,4710 R7.1
NetJ1_7: J1.7 R9.1 | length 5090
  Top Layer w10: v1(350,5050) 350,3526.77 R9.1 ; v1(350,5274.99) 475.01,5400 v1(2000,5400) ; J1.7@3229.74,5487.81 J1.7
  Bottom Layer w10: v1(350,5050) v1(350,5274.99) ; v1(2000,5400) 2200,5200 2900,5200 3190.51,5490.51 3232.44,5490.51 J1.7
NetJ1_8: J1.8 R11.1 | length 4388.7
  Top Layer w10: R11.1 476.77,3005.91 300,3182.68 300,5124.92 525.08,5350 v1(1600,5350)
  Bottom Layer w10: v1(1600,5350) 1601.91,5351.91 1601.91,5362.94 1900,5661.02 J1.8
NetJ1_9: J1.9 R13.1 | length 4882
  Top Layer w10: J1.9 2516.12,5752.14 3400,5752.14 3500,5652.14 3500,5405.86 3505.86,5400 4740.69,5400 5150,4990.69 5150,3572.21 4983.69,3405.91 R13.1
NetJ1_10: J1.10 R15.1 | length 5317
  Top Layer w10: v1(3535,5700) 3535,5465 3550,5450 4750,5450 5200,5000 5200,3129.29 4986.61,2915.91 R15.1
  Bottom Layer w10: J1.10 2726.97,5800 3435,5800 v1(3535,5700)
NetJ1_11: J1.11 R17.1 | length 6102.6
  Top Layer w10: R17.1 463.39,1905.91 258.07,2111.22 255.86,2111.22 255.86,5250 505.86,5500 v1(2000,5500)
  Bottom Layer w10: v1(2000,5500) 2086.61,5586.61 2676.57,5586.61 J1.11
NetJ1_12: J1.12 R19.1 | length 7267.8
  Top Layer w10: R19.1 463.39,1505.91 219.29,1750 205.86,1750 200,1755.86 200,5294.14 455.86,5550 v1(736,5550) ; v1(2674.99,5150) 2839.57,5314.58 2839.57,5586.61 J1.12
  Bottom Layer w10: v1(736,5550) 1293,5550 1693,5150 v1(2674.99,5150)
NetJ1_13: J1.13 R21.1 | length 5696
  Top Layer w10: v1(3650,5500) 4800,5500 5250,5050 5250,2155.86 5244.14,2150 5233.69,2150 5010.19,1926.5 5004.28,1926.5 4983.69,1905.91 R21.1
  Bottom Layer w10: J1.13 3151.38,5586.61 3313.39,5586.61 3400,5500 v1(3650,5500)
NetJ1_14: J1.14 R23.1 | length 6023.4
  Top Layer w10: v1(3850,5550) 4850,5550 5300,5100 5300,1822.21 4983.69,1505.91 R23.1
  Bottom Layer w10: J1.14 3250.98,5650 3400,5650 3500,5550 v1(3850,5550)
pads on no net: J1. J2. J2.1 U4.1 U4.7

## Polygon pours and split planes (outlines as drawn)
GND on Ground "GND_L03_P000" (solid, pour order 0): 0,0 5500,0 5500,6500 0,6500
+5V on Power "+5V_L02_P005" (solid, pour order 5): 5000,6250 4250,6250 3250.98,5000 4250.39,5000 4249.41,4999.02 2246.4,4999.02 2246.4,1253.6 2250,1250 5000,1250
+24V on Power "+24V_L02_P003" (solid, pour order 3): 2350,5400 2350,6282.99 600,6282.99 600,5399.76